# EAGLE board shield (EAGLE 6.5.0)
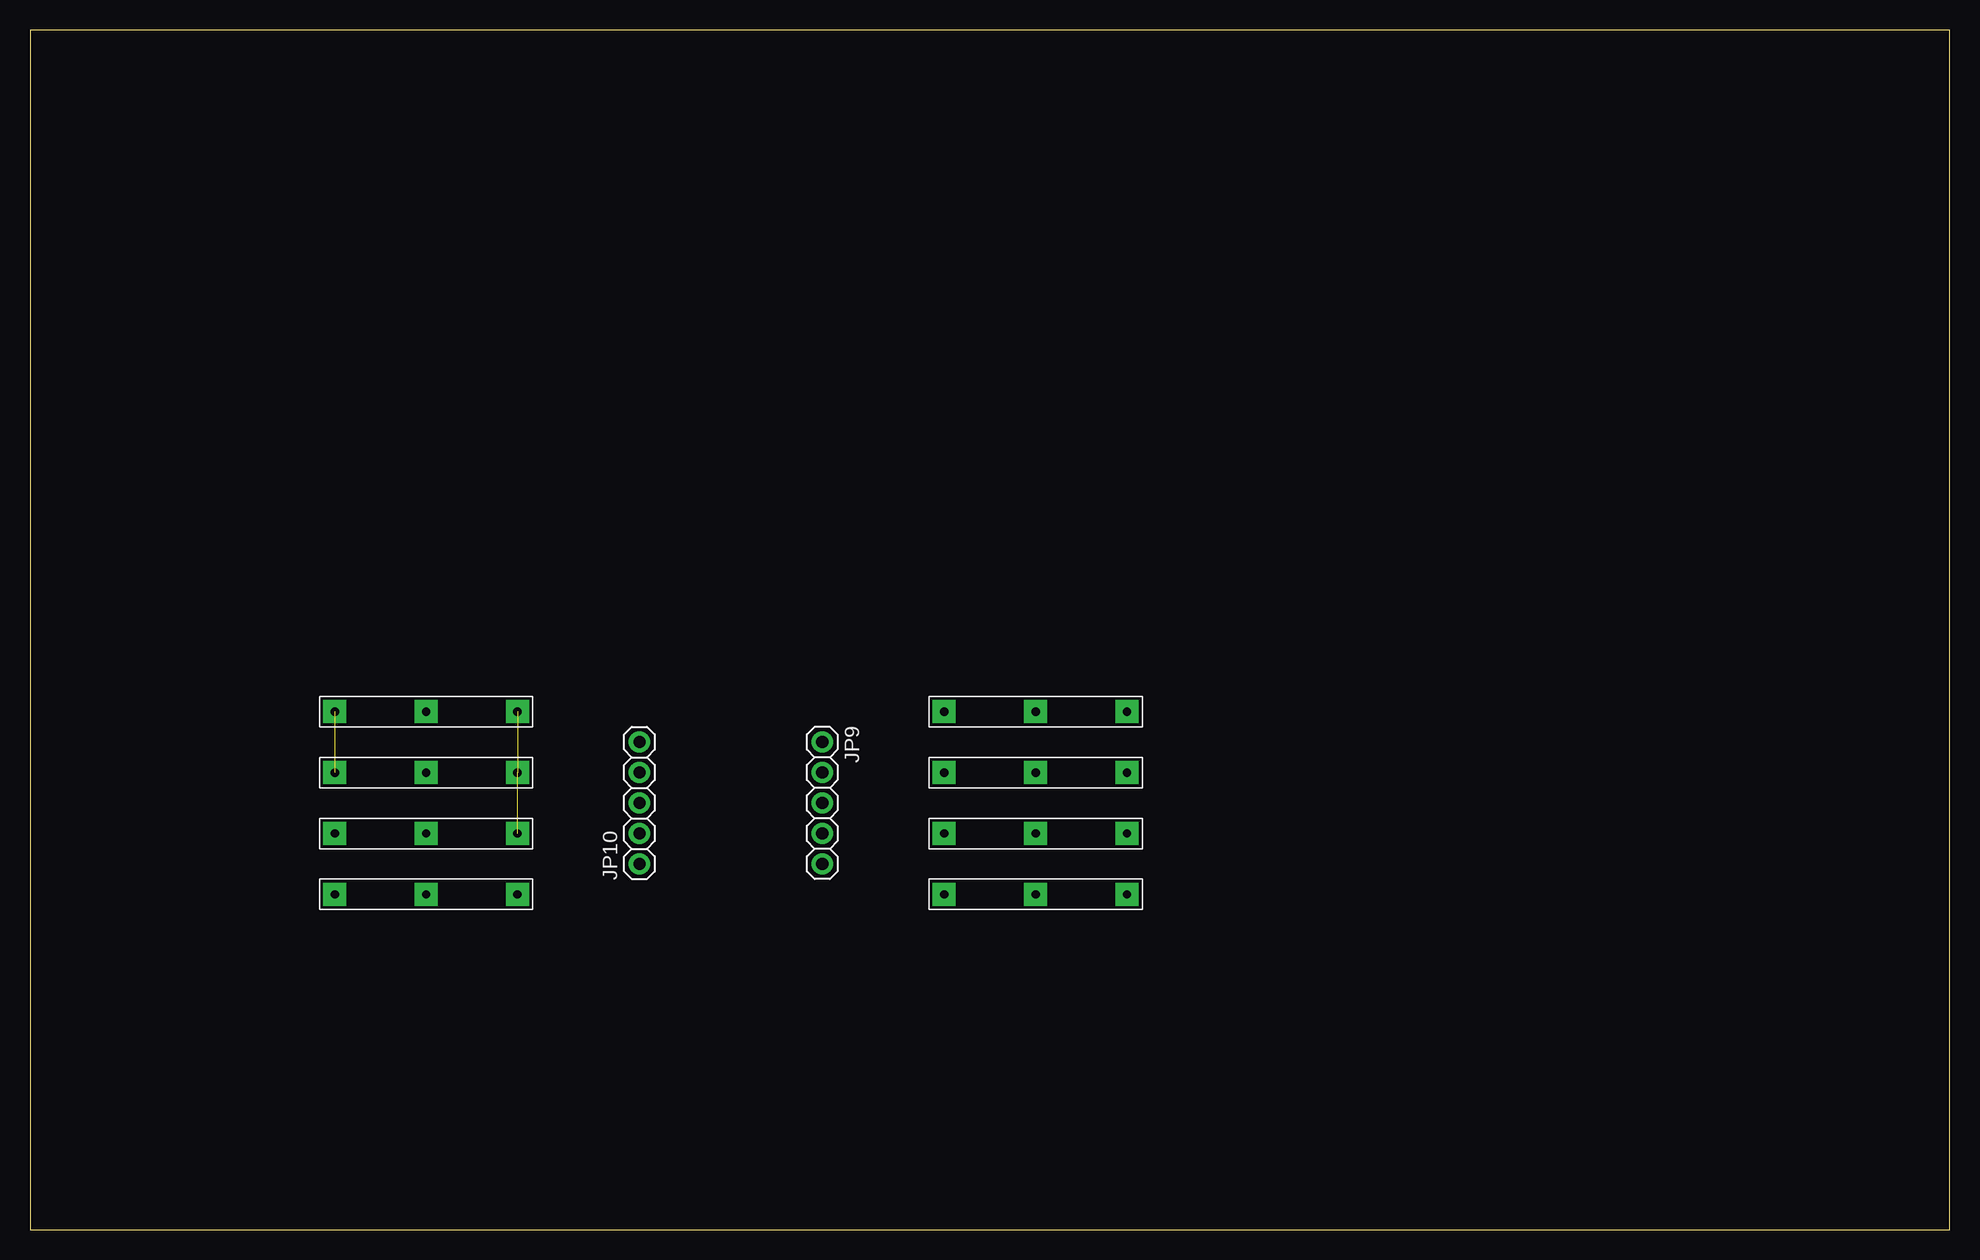
[diagram p0: board, top side]
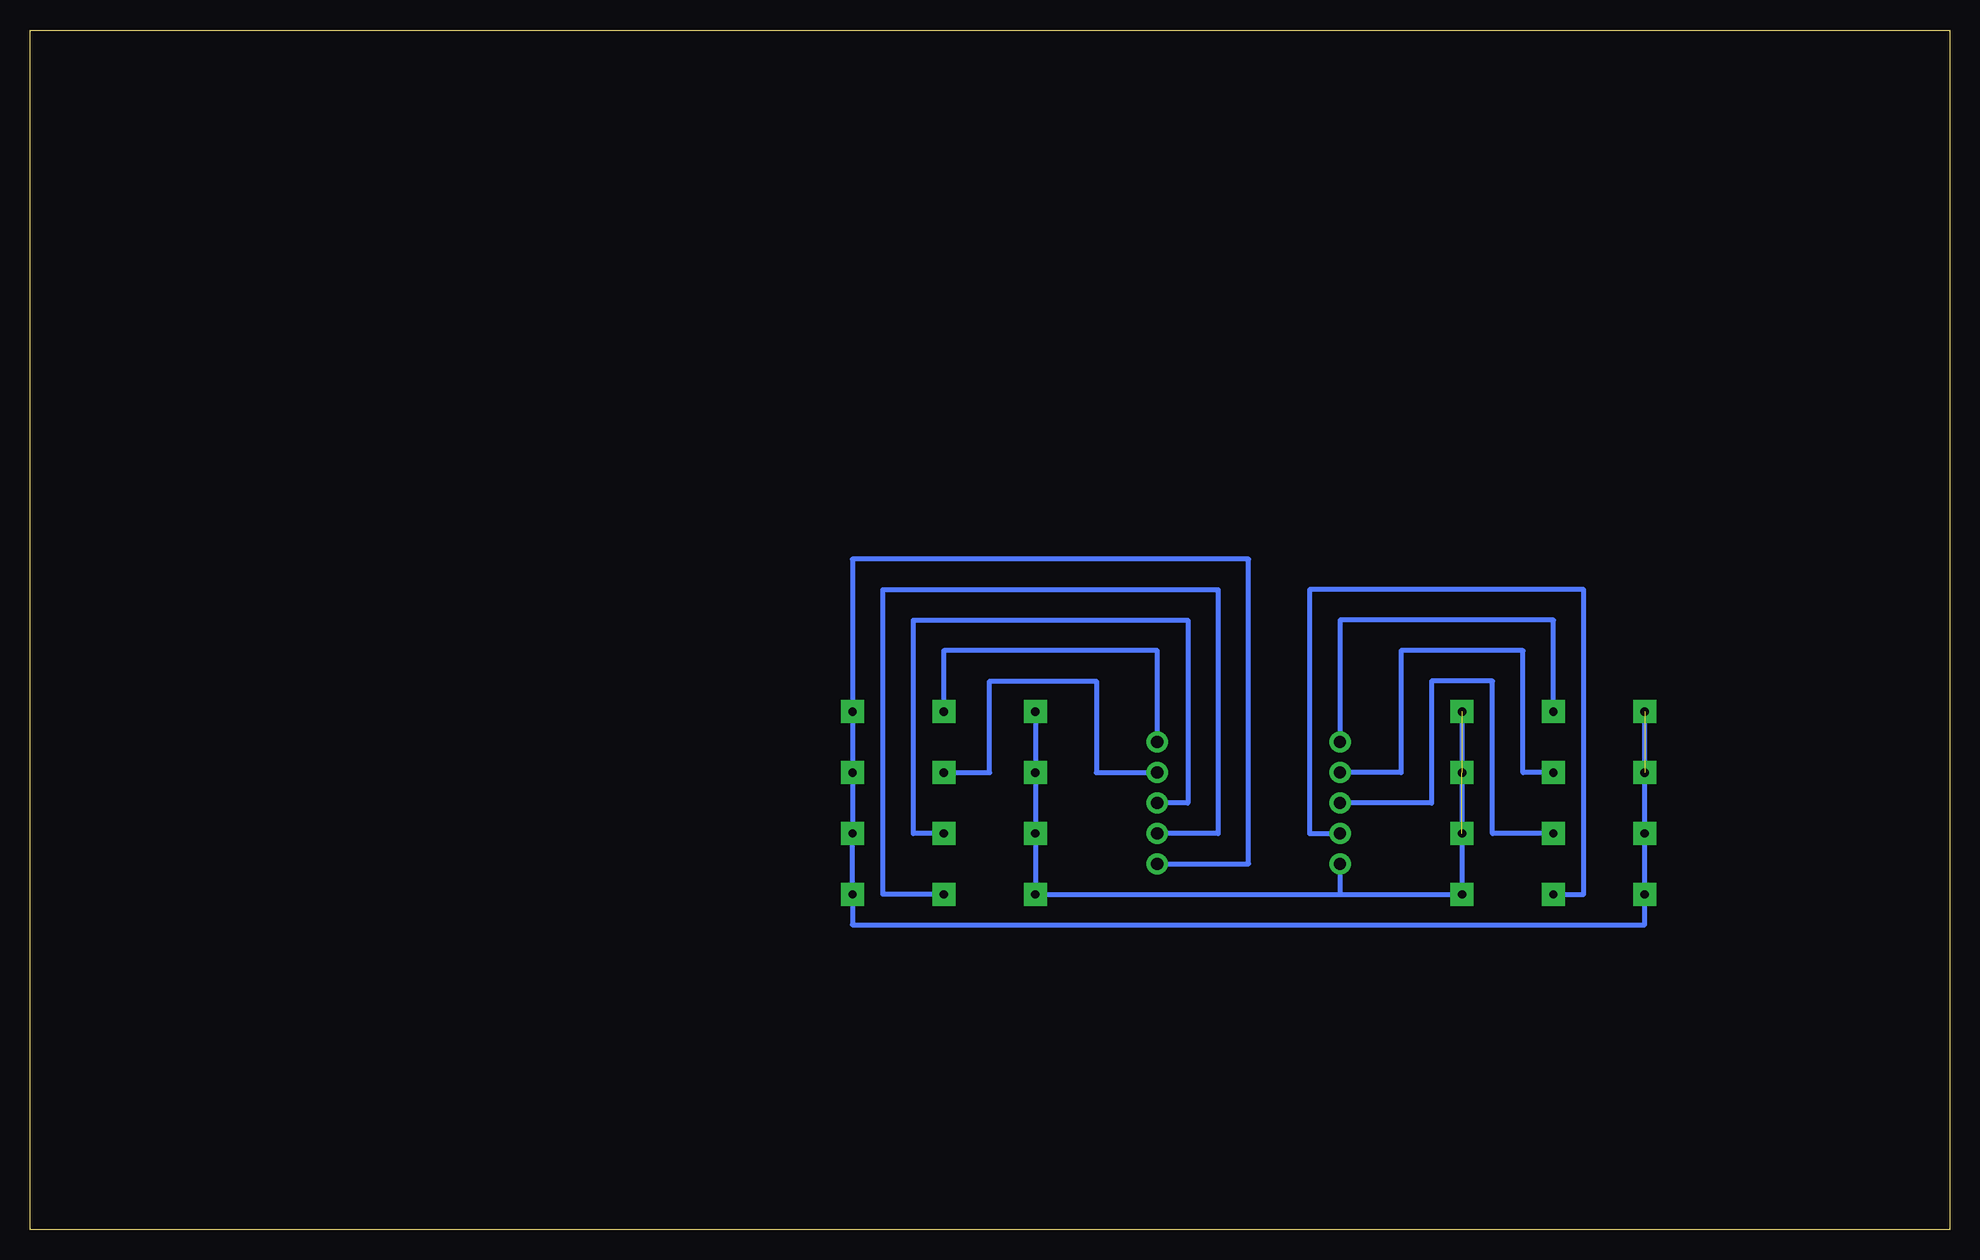
[diagram p1: board, bottom side, seen from below]

Size 160 x 100 mm. Coordinates in mm from the lower left corner, seen from the top.
Outline: 0,0 160,0 160,100 0,100 0,0
Copper layers (1*16): Top 0.035mm / dielectric 1.5mm / Bottom 0.035mm
Design rules "default": minimum track width 10mil, minimum drill 24mil, track to track 8mil, track to pad 8mil, pad to pad 8mil, via to via 8mil, smd to smd 8mil, copper to edge 40mil, drill to drill 8mil, minimum pad ring 10mil, minimum via ring 8mil, stop-mask expansion 4mil, vias tented up to drill 0mil, thermal gap 10mil

## Footprints (pad centres in the part's own frame; a part is rotated, then mirrored left to right if it is on the bottom)
1X03-POTENTIOSHIELD = drill 0.7 pad 1.93 square: 1 -7.62,0; 2 0,0; 3 7.62,0
1X05 = drill 1.016 pad 1.778: 1 -5.08,0; 2 -2.54,0; 3 0,0; 4 2.54,0; 5 5.08,0

## Placement (x,y rotation side)
JP1  [1X03-POTENTIOSHIELD]  83.82,43.18 0 top
JP2  [1X03-POTENTIOSHIELD]  83.82,38.1 0 top
JP3  [1X03-POTENTIOSHIELD]  83.82,33.02 0 top
JP4  [1X03-POTENTIOSHIELD]  83.82,27.94 0 top
JP5  [1X03-POTENTIOSHIELD]  33.02,27.94 180 top
JP6  [1X03-POTENTIOSHIELD]  33.02,33.02 180 top
JP7  [1X03-POTENTIOSHIELD]  33.02,38.1 180 top
JP8  [1X03-POTENTIOSHIELD]  33.02,43.18 180 top
JP9  [1X05]  66.04,35.56 270 top
JP10  [1X05]  50.8,35.56 90 top

## Library data of the parts
JP1-JP10 = manticore-lib

## Nets
GND: JP1.1 JP2.1 JP3.1 JP4.1 JP5.1 JP6.1 JP7.1 JP8.1 JP10.1
N$1: JP1.2 JP9.1
N$2: JP2.2 JP9.2
N$3: JP3.2 JP9.3
N$4: JP4.2 JP9.4
N$5: JP5.2 JP10.2
N$6: JP6.2 JP10.3
N$7: JP7.2 JP10.4
N$8: JP8.2 JP10.5
VCC: JP1.3 JP2.3 JP3.3 JP4.3 JP5.3 JP6.3 JP7.3 JP8.3 JP9.5

## Tracks (layer width: path | path; a pad name or v marks a point on that pad's centre or on a via)
GND  (2 unrouted)
  Bottom 0.406: JP1.1 JP2.1 JP3.1 JP4.1 50.8,27.94 | JP8.1 JP5.1 50.8,27.94 | JP10.1 50.8,27.94
N$1
  Bottom 0.406: JP1.2 83.82,48.26 66.04,48.26 JP9.1
N$2
  Bottom 0.406: JP2.2 80.01,38.1 80.01,45.72 71.12,45.72 71.12,38.1 JP9.2
N$3
  Bottom 0.406: JP3.2 86.36,33.02 86.36,50.8 63.5,50.8 63.5,35.56 JP9.3
N$4
  Bottom 0.406: JP4.2 88.9,27.94 88.9,53.34 60.96,53.34 60.96,33.02 JP9.4
N$5
  Bottom 0.406: JP5.2 30.48,27.94 30.48,53.34 53.34,53.34 53.34,33.02 JP10.2
N$6
  Bottom 0.406: JP6.2 38.1,33.02 38.1,45.72 43.18,45.72 43.18,35.56 JP10.3
N$7
  Bottom 0.406: JP7.2 35.56,38.1 35.56,48.26 45.72,48.26 45.72,38.1 JP10.4
N$8
  Bottom 0.406: JP8.2 33.02,50.8 50.8,50.8 JP10.5
VCC  (1 unrouted)
  Bottom 0.406: JP3.3 JP2.3 JP1.3 91.44,55.88 58.42,55.88 58.42,30.48 JP9.5 | 91.44,32.38 JP3.3 | JP8.3 JP6.3 JP5.3 25.4,25.4 91.44,25.4 JP4.3 JP3.3